# Altium PCB Copy of PCB_FORMATION.PcbDoc
Units mm, origin at the board's own origin, x right, y up, seen from the top; angles counter-clockwise.
Board outline 50.04 x 40 mm, 2 copper layers (Top Layer, Bottom Layer); 22 components, 12 nets, 98 pads, 0 vias.
Unrouted connection lines stored in the file: 64.
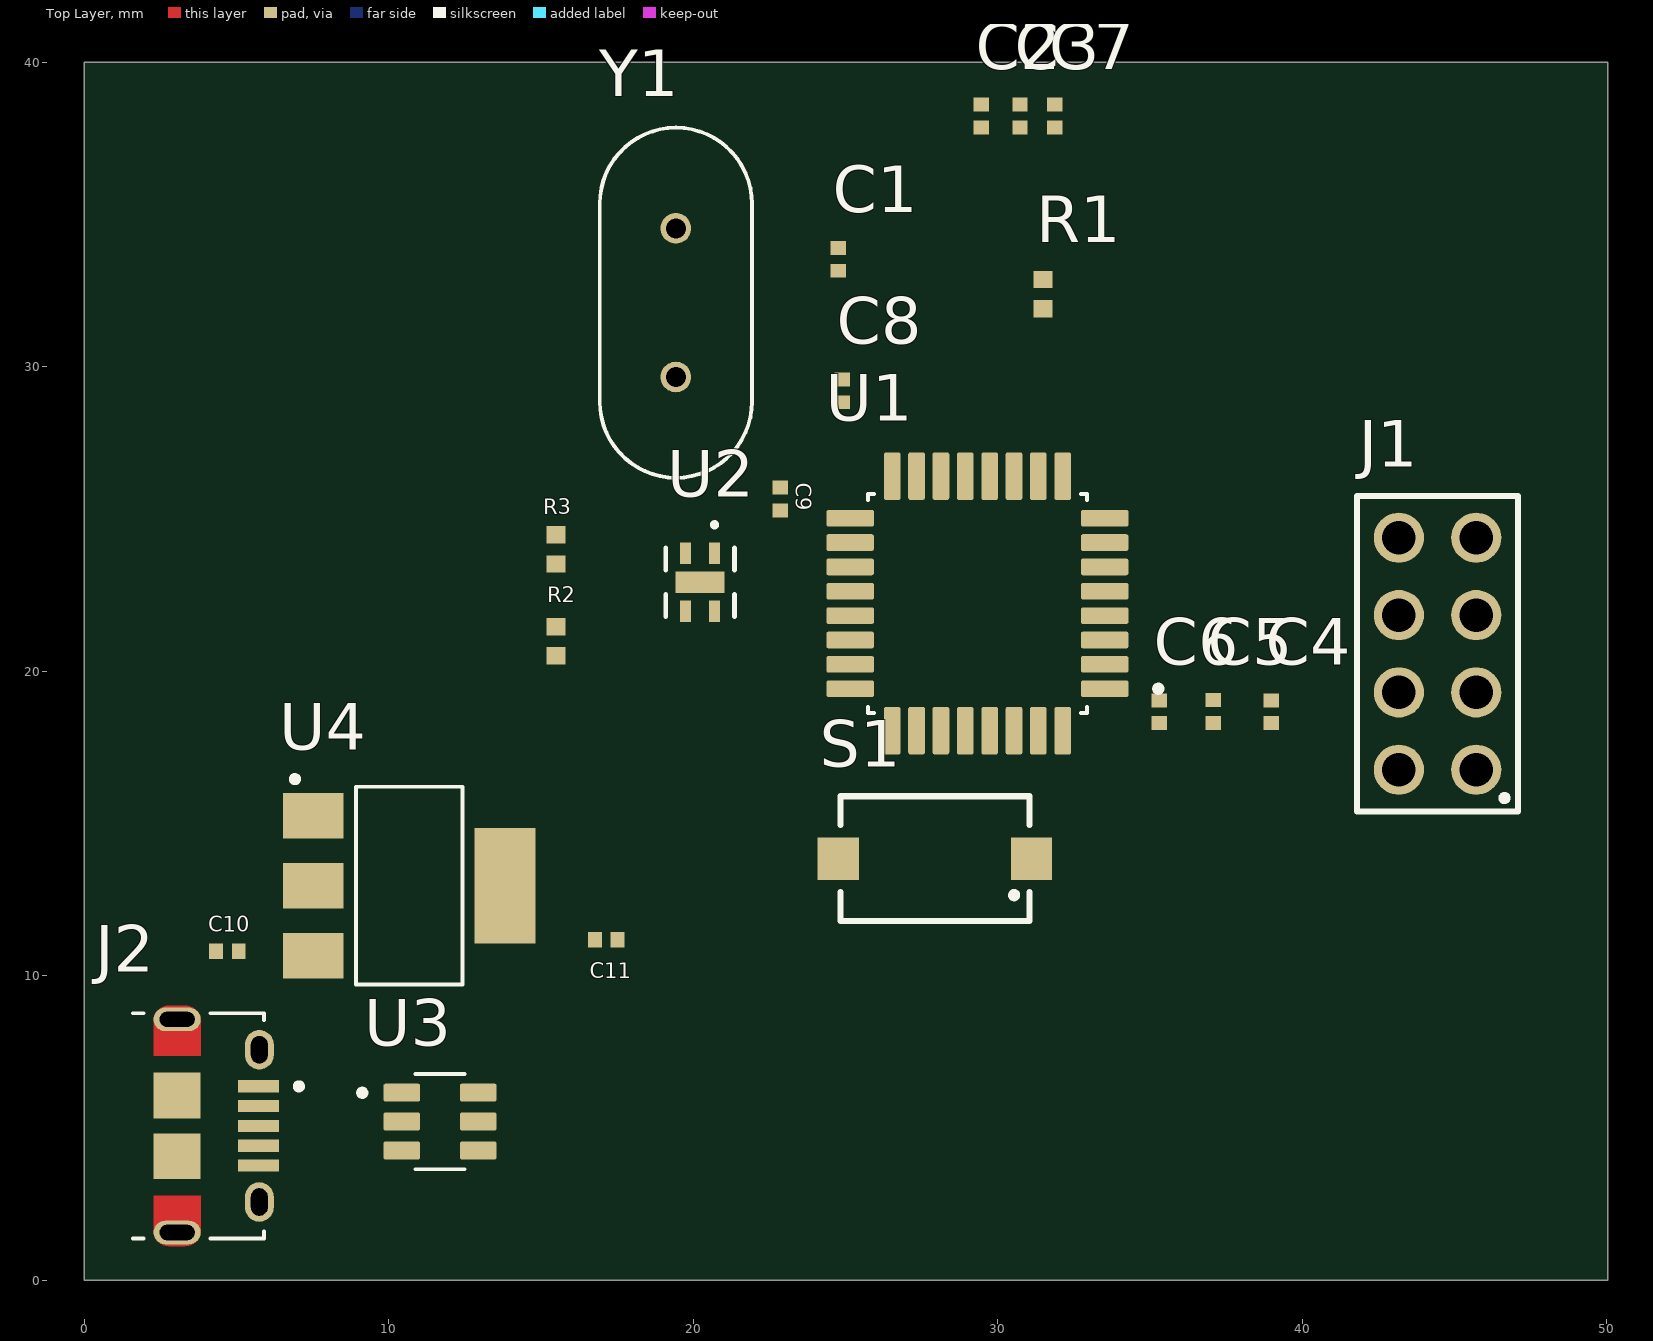
[diagram p0: Top Layer view]
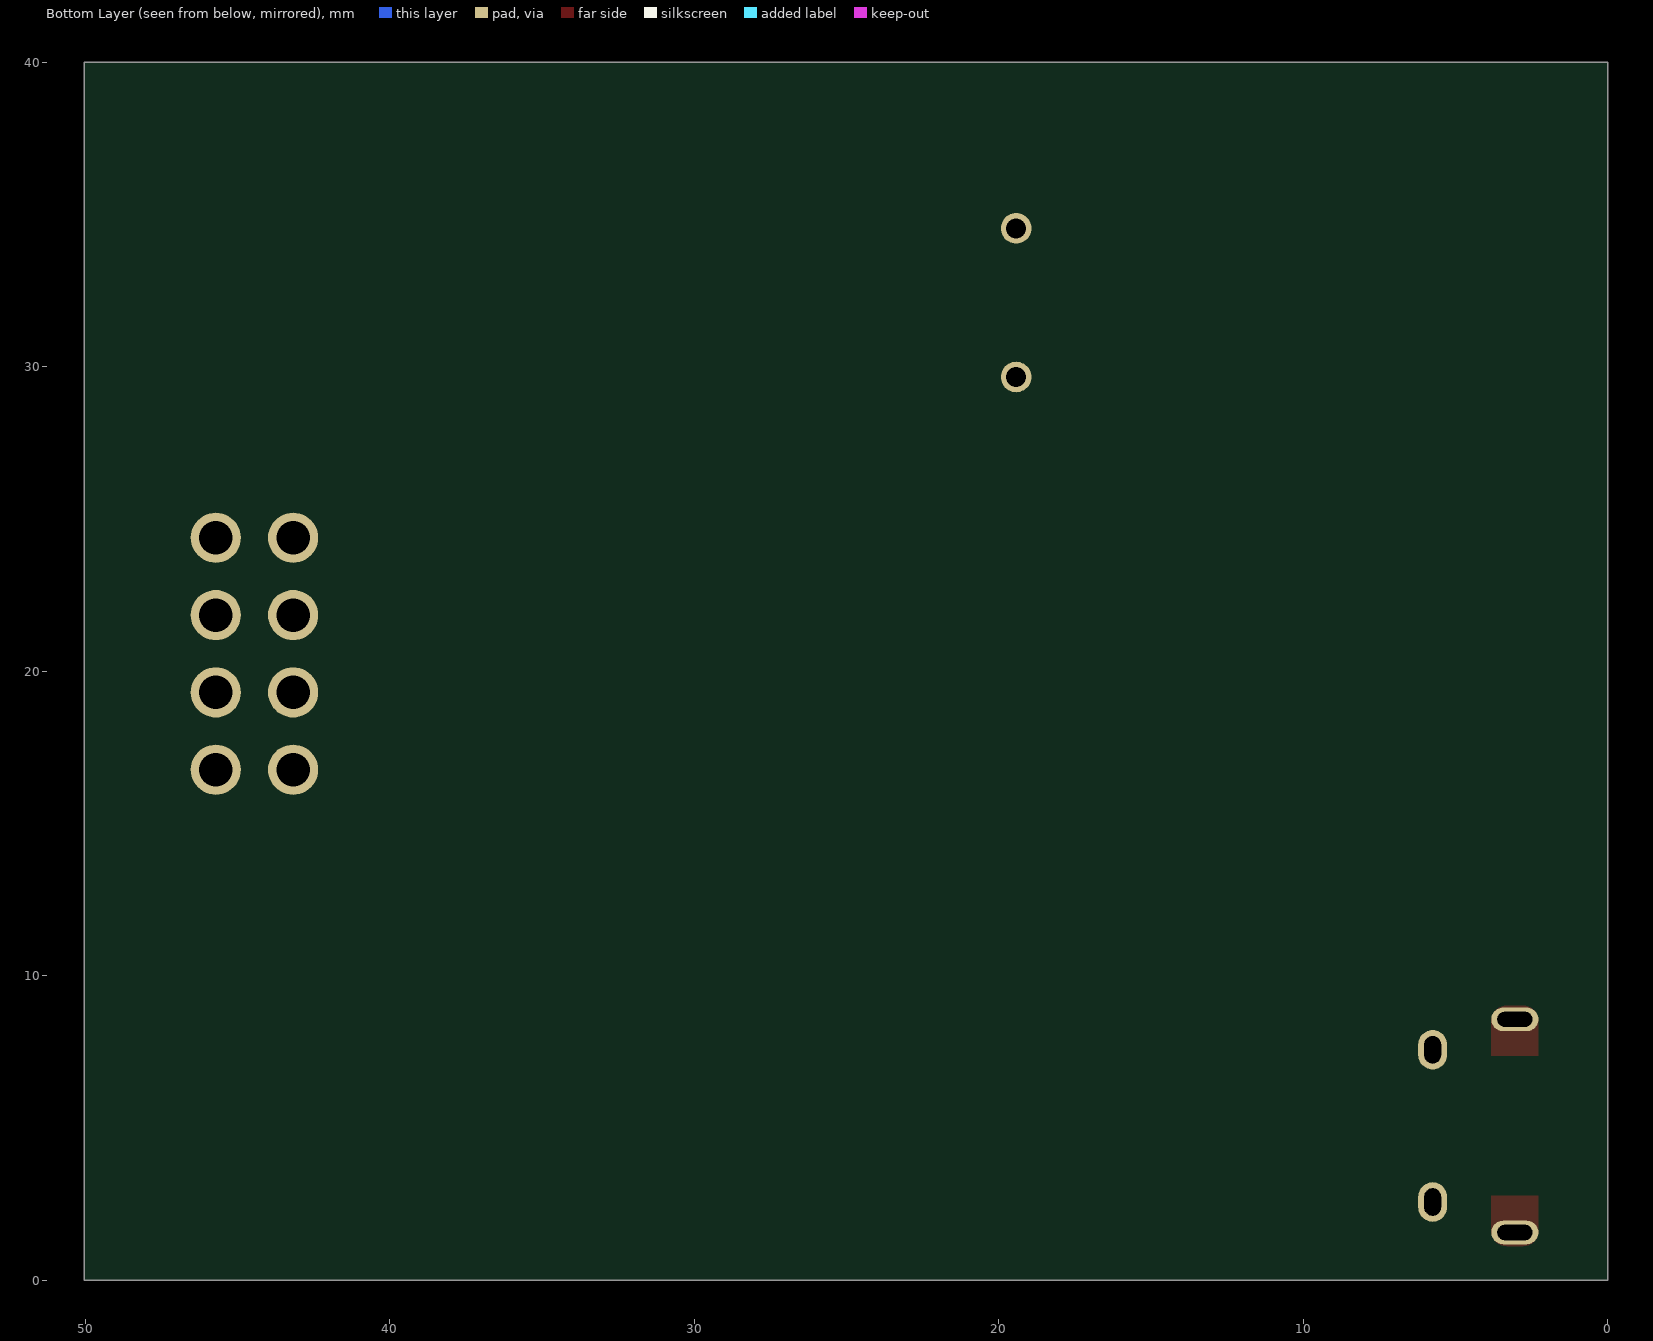
[diagram p1: Bottom Layer view, seen from below]

## Layer stack, top to bottom
Top Solder: solder mask 0.0102, Solder Resist, Dk 3.5
Top Layer: signal copper 0.0356
Dielectric 1: dielectric 0.32, FR-4, Dk 4.8
Bottom Layer: signal copper 0.0356
Bottom Solder: solder mask 0.0102, Solder Resist, Dk 3.5

## Board outline
0,0 0,40 50.038,40 50.038,0

## Design rules (kind name [scope] priority, off if disabled: settings)
Clearance [All] p1: gap=0.254 ignorepadtopadclearanceinfootprint=FALSE
DiffPairsRouting [All] p1: maxlimit=0.254 minlimit=0.254 mostfreqgap=0.254 toplayer_minwidth=0.381 toplayer_maxwidth=0.381 toplayer_prefwidth=0.381 bottomlayer_minwidth=0.381 bottomlayer_maxwidth=0.381 bottomlayer_prefwidth=0.381 maxuncoupledlength=12.7
PolygonConnect [All] p1: connectstyle=Relief reliefconductorwidth=0.254 reliefentries=4 polygonreliefangle="90 Angle" airgapwidth=0.254
RoutingVias [All] p1: holewidth=0.711 width=1.27 viastyle="Through Hole" minholewidth=0.711 minwidth=1.27 maxholewidth=0.711 maxwidth=1.27
SolderMaskExpansion [All] p1: expansion=0.102 istentingtop=FALSE
SupplyNets "Schematic Supply Nets_2" [InNet('5V')] p1: voltage=0.000
SupplyNets "Schematic Supply Nets_1" [InNet('3V3')] p2: voltage=0.000
SupplyNets "Schematic Supply Nets" [InNet('GND')] p3: voltage=0.000
Width [All] p1: maxlimit=0.254 minlimit=0.254 preferedwidth=0.254
29 further rules are at their usual default settings.

## Classes and differential pairs
component class U_USB: J2 U3
component class U_POWER: C10 C11 U4
component class U_MCU: C1 C2 C3 C4 C5 C6 C7 C8 J1 R1 S1 U1 Y1
component class U_Capteur: C9 R2 R3 U2
differential pair D: +D_P -D_N

## Components (designator, comment, footprint, x,y, rotation, side; value= is the part's Value field where it differs from the comment)
C1 "22pF" CAP_0402L 24.765,33.528 r270 top value=100nF
C2 "4.7uF" CAP_0402L 29.464,38.233 r90 top value=100nF
C3 "100nF" CAP_0402L 30.734,38.233 r90 top
C4 "4.7uF" CAP_0402L 38.989,18.669 r270 top value=100nF
C5 "100nF" CAP_0402L 37.084,18.675 r270 top
C6 "1uF" CAP_0402L 35.306,18.669 r270 top value=100nF
C7 "10nF" CAP_0402L 31.877,38.233 r90 top value=100nF
C8 "22pF" CAP_0402L 24.892,29.21 r90 top value=100nF
C9 "100nF" CAP_0402L 22.86,25.654 r270 top
C10 "10uF" CAP_0402L 4.699,10.795 r180 top value=100nF
C11 "10uF" CAP_0402L 17.145,11.176 r0 top value=100nF
J1 "6130XX21121_61300821121" 61300821121 44.45,20.574 r90 top
J2 "10118194-0001LF" AMPHENOL_10118194-0001LF 3.048,5.064 r270 top
R1 "10K" RES_0402N 31.496,32.385 r90 top value=0
R2 "4K7" RES_0402N 15.494,20.983 r90 top value=0
R3 "4K7" RES_0402N 15.494,24.003 r270 top value=0
S1 "434123025816" 434123025816 27.94,13.843 r180 top
U1 "STM32F042K6T6TR" QFP80P900X900X160-32N 29.337,22.225 r180 top
U2 "ENS210-LQFM" SON-04-ENS210_2X2_AMS 20.226,22.924 r270 top
U3 "USBLC6-2SC6" SOT95P280X145-6N 11.684,5.207 r0 top
U4 "NCP1117LPST33T3G" SOT230P700X175-4N 10.668,12.954 r0 top
Y1 "ABL-8.000MHZ-B2" XTAL_HC49P488W46L1150T500H350 19.431,32.104 r90 top

## Footprints (in the part's own frame and the unit in brackets; to place one, negate y for a bottom-side part, rotate by r counter-clockwise, add the part's x,y. Pads: shape width x height; smd on the part's side, far side on the other; paste and mask are expansions set on the pad)
61300821121 [mm]
  round 1.65 hole 1.1: 1(-3.81,-1.27) 2(-3.81,1.27) 3(-1.27,-1.27) 4(-1.27,1.27) 5(1.27,-1.27) 6(1.27,1.27) 7(3.81,-1.27) 8(3.81,1.27)
  silkscreen extent -5.18,-2.64 5.18,2.64, body extent -5.08,-2.54 5.08,2.54, height 5.54
434123025816 [mm]
  rect 1.35x1.4 smd paste+0 mask+0.102: 1(-3.175,0) 2(3.175,0)
  silkscreen extent -3.1,-2.05 3.1,2.05, body extent -3.5,-1.95 3.5,1.95, height 2.5
AMPHENOL_10118194-0001LF [mm]
  rect 0.4x1.35 smd: 1(-1.3,2.675) 2(-0.65,2.675) 3(0,2.675) 4(0.65,2.675) 5(1.3,2.675)
  oval 0.775x1.55 hole 0.5 slot 1.15 at 90 deg mask+0: SH1(-3.5,0) SH4(3.5,0)
  rect 1.5x1.55 smd: SH2(1,0) SH3(-1,0)
  oval 1.3x0.95 hole 0.55 slot 0.9 at 0 deg: SH5(-2.5,2.7) SH6(2.5,2.7)
  Top Layer region: -2.3,-0.775 -3.445,-0.775 -3.471,-0.774 -3.497,-0.772 -3.523,-0.769 -3.549,-0.764 -3.574,-0.758 -3.6,-0.751 -3.624,-0.742 -3.648,-0.732 -3.672,-0.721 -3.695,-0.708 -3.717,-0.694 -3.739,-0.68 -3.76,-0.664 -3.78,-0.647 -3.799,-0.629 -3.817,-0.61 -3.834,-0.59 -3.85,-0.569 -3.864,-0.547 -3.878,-0.525 -3.891,-0.502 -3.902,-0.478 -3.912,-0.454 -3.921,-0.43 -3.928,-0.404 -3.934,-0.379 -3.939,-0.353 -3.942,-0.327 -3.944,-0.301 -3.945,-0.275 -3.945,0.275 -3.944,0.301 -3.942,0.327 -3.939,0.353 -3.934,0.379 -3.928,0.404 -3.921,0.43 -3.912,0.454 -3.902,0.478 -3.891,0.502 -3.878,0.525 -3.864,0.547 -3.85,0.569 -3.834,0.59 -3.817,0.61 -3.799,0.629 -3.78,0.647 -3.76,0.664 -3.739,0.68 -3.717,0.694 -3.695,0.708 -3.672,0.721 -3.648,0.732 -3.624,0.742 -3.6,0.751 -3.574,0.758 -3.549,0.764 -3.523,0.769 -3.497,0.772 -3.471,0.774 -3.445,0.775 -2.3,0.775
  Top Layer region: 3.471,0.774 3.497,0.772 3.523,0.769 3.549,0.764 3.574,0.758 3.6,0.751 3.624,0.742 3.648,0.732 3.672,0.721 3.695,0.708 3.717,0.694 3.739,0.68 3.76,0.664 3.78,0.647 3.799,0.629 3.817,0.61 3.834,0.59 3.85,0.569 3.864,0.547 3.878,0.525 3.891,0.502 3.902,0.478 3.912,0.454 3.921,0.43 3.928,0.404 3.934,0.379 3.939,0.353 3.942,0.327 3.944,0.301 3.945,0.275 3.945,-0.275 3.944,-0.301 3.942,-0.327 3.939,-0.353 3.934,-0.379 3.928,-0.404 3.921,-0.43 3.912,-0.454 3.902,-0.478 3.891,-0.502 3.878,-0.525 3.864,-0.547 3.85,-0.569 3.834,-0.59 3.817,-0.61 3.799,-0.629 3.78,-0.647 3.76,-0.664 3.739,-0.68 3.717,-0.694 3.695,-0.708 3.672,-0.721 3.648,-0.732 3.624,-0.742 3.6,-0.751 3.574,-0.758 3.549,-0.764 3.523,-0.769 3.497,-0.772 3.471,-0.774 3.445,-0.775 2.3,-0.775 2.3,0.775 3.445,0.775
  silkscreen extent -3.7,-1.45 3.7,4.1, body extent -4.02,-2.68 4.02,2.85, height 2.67
CAP_0402L [mil]
  rect 18x20 smd: 1(14.76,0) 2(-14.76,0)
  body extent -20,-10 20,10, height 19
QFP80P900X900X160-32N [mm]
  rrect25% 1.56x0.55 smd paste+0 mask+0.102: 1(-4.18,2.8) 2(-4.18,2) 3(-4.18,1.2) 4(-4.18,0.4) 5(-4.18,-0.4) 6(-4.18,-1.2) 7(-4.18,-2) 8(-4.18,-2.8) 17(4.18,-2.8) 18(4.18,-2) 19(4.18,-1.2) 20(4.18,-0.4) 21(4.18,0.4) 22(4.18,1.2) 23(4.18,2) 24(4.18,2.8)
  rrect25% 0.55x1.56 smd paste+0 mask+0.102: 9(-2.8,-4.18) 10(-2,-4.18) 11(-1.2,-4.18) 12(-0.4,-4.18) 13(0.4,-4.18) 14(1.2,-4.18) 15(2,-4.18) 16(2.8,-4.18) 25(2.8,4.18) 26(2,4.18) 27(1.2,4.18) 28(0.4,4.18) 29(-0.4,4.18) 30(-1.2,4.18) 31(-2,4.18) 32(-2.8,4.18)
  silkscreen extent -6.04,-3.6 3.6,3.6, body extent -4.5,-4.5 4.5,4.5, height 1.6
RES_0402N [mm]
  rect 0.57x0.62 smd: 1(0.48,0) 2(-0.48,0)
  body extent -0.5,-0.25 0.5,0.25, height 0.35
SON-04-ENS210_2X2_AMS [mil]
  rect 28x14 smd paste+0 mask+0: 1(-37.5,18.7) 2(-37.5,-18.7) 3(37.5,-18.7) 4(37.5,18.7)
  rect 28x63 smd paste+0 mask+0: 5(0,0)
  silkscreen extent -77,-45 45,45, body extent -39,-39 39,39, height 32
SOT95P280X145-6N [mm]
  rrect25% 1.21x0.59 smd: 1(-1.255,0.95) 2(-1.255,0) 3(-1.255,-0.95) 4(1.255,-0.95) 5(1.255,0) 6(1.255,0.95)
  silkscreen extent -2.65,-1.57 0.81,1.57, body extent -1.4,-1.46 1.4,1.46, height 1.42
SOT230P700X175-4N [mm]
  rect 2x1.5 smd paste+0 mask+0.102: 1(-3.15,2.3) 2(-3.15,0) 3(-3.15,-2.3)
  rect 2x3.8 smd paste+0 mask+0.102: 4(3.15,0)
  silkscreen extent -3.85,-3.25 1.75,3.6, body extent -3.5,-3.45 3.5,3.05, height 1.57
XTAL_HC49P488W46L1150T500H350 [mm]
  round 1.007 hole 0.657: 1(-2.44,0) 2(2.44,0)
  silkscreen extent -5.75,-2.5 5.75,2.5, body extent -5.75,-2.5 5.75,2.5, height 3.25

## Part data
C1 C8: library part "CAP CER 22pF", "CAP CER 22pF 16V X7R 10% 0402", Capacitance=100nF, Capacitor Type=Ceramic, Case/Package=0402, Dielectric=X7R, Max Operating Temperature=125°C, Min Operating Temperature=-55°C, Package Quantity=50000, Tolerance=10%, Voltage Rating=16V, Construction=Flat, Depth=0.5mm, Dielectric Material=Ceramic, Height=0.5mm, Length=1mm, Mount="Surface Mount", Packaging="Tape and Reel", RoHS=Yes, Series=C, Thickness=0.022inch, Voltage Rating (DC)=16V, Width=0.02inch
C2 C4: library part "CAP CER 4.7uF", "CAP CER 4.7uF 16V X7R 10% 0402", Capacitance=100nF, Capacitor Type=Ceramic, Case/Package=0402, Dielectric=X7R, Max Operating Temperature=125°C, Min Operating Temperature=-55°C, Package Quantity=50000, Tolerance=10%, Voltage Rating=16V, Construction=Flat, Depth=0.5mm, Dielectric Material=Ceramic, Height=0.5mm, Length=1mm, Mount="Surface Mount", Packaging="Tape and Reel", RoHS=Yes, Series=C, Thickness=0.022inch, Voltage Rating (DC)=16V, Width=0.02inch
C3 C5 C9: library part "CAP CER 100nF", "CAP CER 100nF 16V X7R 10% 0402", Capacitor Type=Ceramic, Case/Package=0402, Dielectric=X7R, Max Operating Temperature=125°C, Min Operating Temperature=-55°C, Package Quantity=50000, Tolerance=10%, Voltage Rating=16V, Capacitance=100nF, Construction=Flat, Depth=0.5mm, Dielectric Material=Ceramic, Height=0.5mm, Length=1mm, Mount="Surface Mount", Packaging="Tape and Reel", RoHS=Yes, Series=C, Thickness=0.022inch, Voltage Rating (DC)=16V, Width=0.02inch
C6: library part "CAP CER 100nF_1", "CAP CER 100nF 16V X7R 10% 0402", Capacitance=100nF, Capacitor Type=Ceramic, Case/Package=0402, Dielectric=X7R, Max Operating Temperature=125°C, Min Operating Temperature=-55°C, Package Quantity=50000, Tolerance=10%, Voltage Rating=16V, Construction=Flat, Depth=0.5mm, Dielectric Material=Ceramic, Height=0.5mm, Length=1mm, Mount="Surface Mount", Packaging="Tape and Reel", RoHS=Yes, Series=C, Thickness=0.022inch, Voltage Rating (DC)=16V, Width=0.02inch
C7: library part "CAP CER 100nF", "CAP CER 100nF 16V X7R 10% 0402", Capacitance=100nF, Capacitor Type=Ceramic, Case/Package=0402, Dielectric=X7R, Max Operating Temperature=125°C, Min Operating Temperature=-55°C, Package Quantity=50000, Tolerance=10%, Voltage Rating=16V, Construction=Flat, Depth=0.5mm, Dielectric Material=Ceramic, Height=0.5mm, Length=1mm, Mount="Surface Mount", Packaging="Tape and Reel", RoHS=Yes, Series=C, Thickness=0.022inch, Voltage Rating (DC)=16V, Width=0.02inch
C10 C11: library part "CAP CER 10µF", "CAP CER 10µF 16V X7R 10% 0402", Capacitance=100nF, Capacitor Type=Ceramic, Case/Package=0402, Dielectric=X7R, Max Operating Temperature=125°C, Min Operating Temperature=-55°C, Package Quantity=50000, Tolerance=10%, Voltage Rating=16V, Construction=Flat, Depth=0.5mm, Dielectric Material=Ceramic, Height=0.5mm, Length=1mm, Mount="Surface Mount", Packaging="Tape and Reel", RoHS=Yes, Series=C, Thickness=0.022inch, Voltage Rating (DC)=16V, Width=0.02inch
J1: "Connector Header Through Hole 8 position 0.100 (2.54mm)", Package=None, Check_prices=https://www.snapeda.com/parts/61300821121/Wurth+Electronics/view-part/?ref=eda, MF="Wurth Electronics", MP=61300821121, SnapEDA_Link=https://www.snapeda.com/parts/61300821121/Wurth+Electronics/view-part/?ref=snap
J2: "Micro USB, Input Output Connectors, B TYPE RECEPTACLE with flange", Package=None, Check_prices=https://www.snapeda.com/parts/10118194-0001LF/Amphenol+FCI/view-part/?ref=eda, MF="Amphenol ICC", MP=10118194-0001LF, SnapEDA_Link=https://www.snapeda.com/parts/10118194-0001LF/Amphenol+FCI/view-part/?ref=snap
R1: library part "RES SMD 10K", "RES SMD 10K OHM 1% 1/16W 0402", Case Code (Imperial)=0402, Case Code (Metric)=1005, Max Operating Temperature=155°C, Min Operating Temperature=-55°C, Power Rating=62.5mW, Resistance=10kR, Temperature Coefficient=100ppm/°C, Tolerance=1%, Voltage Rating=50V, Case/Package=0402, Composition="Thick Film", Depth=0.5mm, Height=0.32mm, Lead Free="Lead Free", Lead Pitch=0.2mm, Length=1mm, Military Standard=Not, Mount=SMD, Number of Pins=2, Number of Terminations=2, Packaging="Tape and Reel", REACH SVHC="No SVHC", RoHS=Yes, Termination=SMD/SMT, Voltage Rating (DC)=50V, Width=0.5mm, Working Voltage=50V
R2 R3: library part Res_4K7, "RES SMD 4.7K OHM 1% 1/16W 0402", Case Code (Imperial)=0402, Case Code (Metric)=1005, Max Operating Temperature=155°C, Min Operating Temperature=-55°C, Power Rating=62.5mW, Resistance=10kR, Temperature Coefficient=100ppm/°C, Tolerance=1%, Voltage Rating=50V, Case/Package=0402, Composition="Thick Film", Depth=0.5mm, Height=0.32mm, Lead Free="Lead Free", Lead Pitch=0.2mm, Length=1mm, Military Standard=Not, Mount=SMD, Number of Pins=2, Number of Terminations=2, Packaging="Tape and Reel", REACH SVHC="No SVHC", RoHS=Yes, Termination=SMD/SMT, Voltage Rating (DC)=50V, Width=0.5mm, Working Voltage=50V
S1: "Tactile Switch SPST-NO Top Actuated Surface Mount", Package=None, Check_prices=https://www.snapeda.com/parts/434123025816/W%25C3%25BCrth+Elektronik+Midcom/view-part/?ref=eda, MF="WÃ¼rth Elektronik", MP=434123025816, SnapEDA_Link=https://www.snapeda.com/parts/434123025816/W%25C3%25BCrth+Elektronik+Midcom/view-part/?ref=snap
U1: "ARMÂ® CortexÂ®-M0 STM32F0 Microcontroller IC 32-Bit Single-Core 48MHz 32KB (32K x 8) FLASH 32-LQFP (7x7)", Package="LQFP-32 STMicroelectronics", Check_prices=https://www.snapeda.com/parts/STM32F042K6T6TR/STMicroelectronics/view-part/?ref=eda, MF=STMicroelectronics, MP=STM32F042K6T6TR, SnapEDA_Link=https://www.snapeda.com/parts/STM32F042K6T6TR/STMicroelectronics/view-part/?ref=snap
U2: "Description", Manufacturer_Name="ams OSRAM", Copyright="Copyright (C) 2025 Ultra Librarian. All rights reserved.", Manufacturer_Part_Number=ENS210-LQFM, RefDes=RefDes, Type=Type
U3: "17V Clamp 5A (8/20Âµs) Ipp Tvs Diode Surface Mount SOT-23-6", Package="SOT-23-6 STMicroelectronics", Availability="In Stock", Check_prices=https://www.snapeda.com/parts/USBLC6-2SC6/STMicroelectronics/view-part/?ref=eda, MF=STMicroelectronics, MP=USBLC6-2SC6, Price=None, Purchase-URL=https://pricing.snapeda.com/search/part/USBLC6-2SC6/?ref=eda, SnapEDA_Link=https://www.snapeda.com/parts/USBLC6-2SC6/STMicroelectronics/view-part/?ref=snap
U4: "Linear Voltage Regulator IC Positive Fixed 1 Output 1A SOT-223", Package="SOT-223-4 ON Semiconductor", Check_prices=https://www.snapeda.com/parts/NCP1117LPST33T3G/Onsemi/view-part/?ref=eda, MF="ON Semiconductor", MP=NCP1117LPST33T3G, SnapEDA_Link=https://www.snapeda.com/parts/NCP1117LPST33T3G/Onsemi/view-part/?ref=snap
Y1: "HC/49US (AT49) MICROPROCESSOR CRYSTAL", Package="HC-49/US ABRACON", Availability="In Stock", Check_prices=https://www.snapeda.com/parts/ABL-8.000MHZ-B2/Abracon+LLC/view-part/?ref=eda, MF=Abracon, MP=ABL-8.000MHZ-B2, Price=None, Purchase-URL=https://pricing.snapeda.com/search/part/ABL-8.000MHZ-B2/?ref=eda, SnapEDA_Link=https://www.snapeda.com/parts/ABL-8.000MHZ-B2/Abracon+LLC/view-part/?ref=snap

## Nets (pads, with @x,y where several pads share a name; then routed paths per layer and width w, separated by ;. In a path a pad name is that pad's centre, name@x,y a point inside that pad or via, vN(x,y) a via of type N, cw(c..) or ccw(c..) an arc to the next point about the centre after c; other vN are vias at no path point)
3V3: C2.2 C3.2 C4.2 C5.2 C6.2 C7.2 C9.2 C11.2 J1.8 R1.2 R2.2 R3.2 U1.1 U1.5 U1.17 U2.1 U4.2 U4.4
5V: C10.2 J2.1 U3.5 U4.3
D_N: J2.2 U1.21 U3.1 U3.6
D_P: J2.3 U1.22 U3.3 U3.4
GND: C1.1 C2.1 C3.1 C4.1 C5.1 C6.1 C7.1 C8.1 C9.1 C10.1 C11.1 J1.1 J2.5 J2.SH1 J2.SH2 J2.SH3 J2.SH4 J2.SH5 J2.SH6 S1.1 U1.16 U1.32 U2.4 U2.5 U3.2 U4.1
NetR2_1: R2.1 U1.20 U2.3
NetR3_1: R3.1 U1.19 U2.2
NRST: J1.2 R1.1 S1.2 U1.4
OSC_IN: C1.2 U1.2 Y1.2
OSC_OUT: C8.2 U1.3 Y1.1
SWCLK: J1.6 U1.24
SWDIO: J1.4 U1.23
pads on no net: J1.3 J1.5 J1.7 J2.4 U1.6 U1.7 U1.8 U1.9 U1.10 U1.11 U1.12 U1.13 U1.14 U1.15 U1.18 U1.25 U1.26 U1.27 U1.28 U1.29 U1.30 U1.31

## Silkscreen, mask and mechanical layers (free items; w line width, h text height)
Mechanical 1:
  the board outline again, w0.254

## Text inside footprints (layer, text, board x,y; h text height)
J2: Mechanical 13 "PCB EDGE" at 1.798,0.814 h0.81 r270